# Altium PCB OSI_542.PcbDoc
Units mil, origin at the board's own origin, x right, y up, seen from the top; angles counter-clockwise.
Board outline 11210 x 6010 mil, 2 copper layers (Top Layer, Bottom Layer); 56 components, 0 nets, 309 pads, 89 vias.
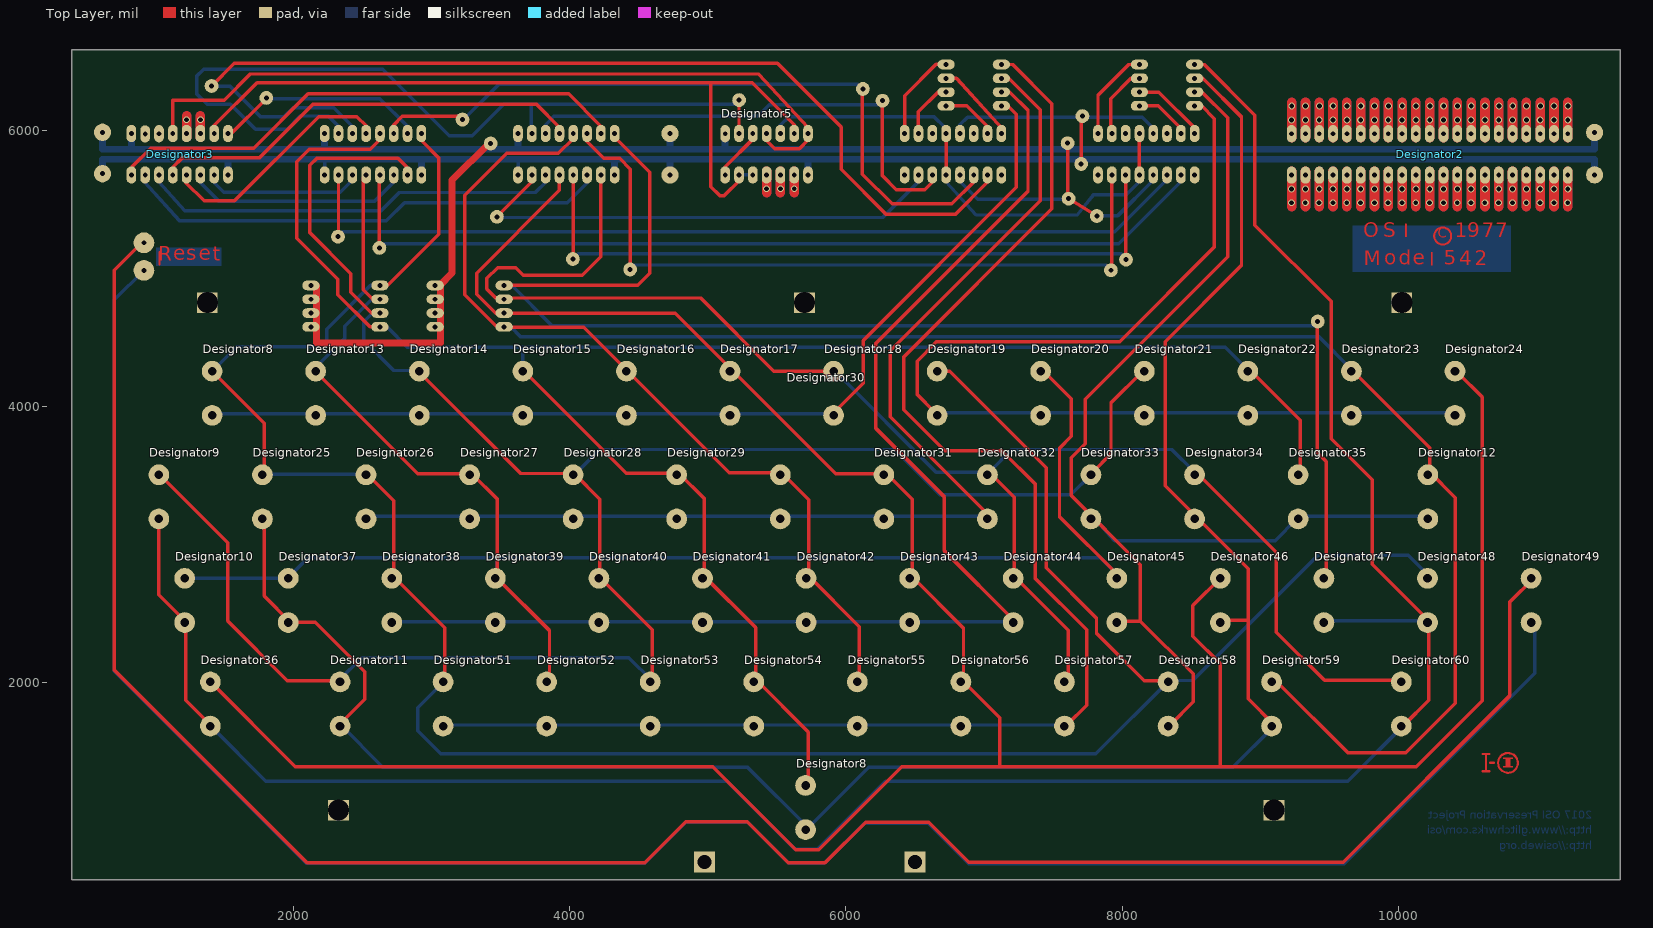
[diagram p0: Top Layer view]
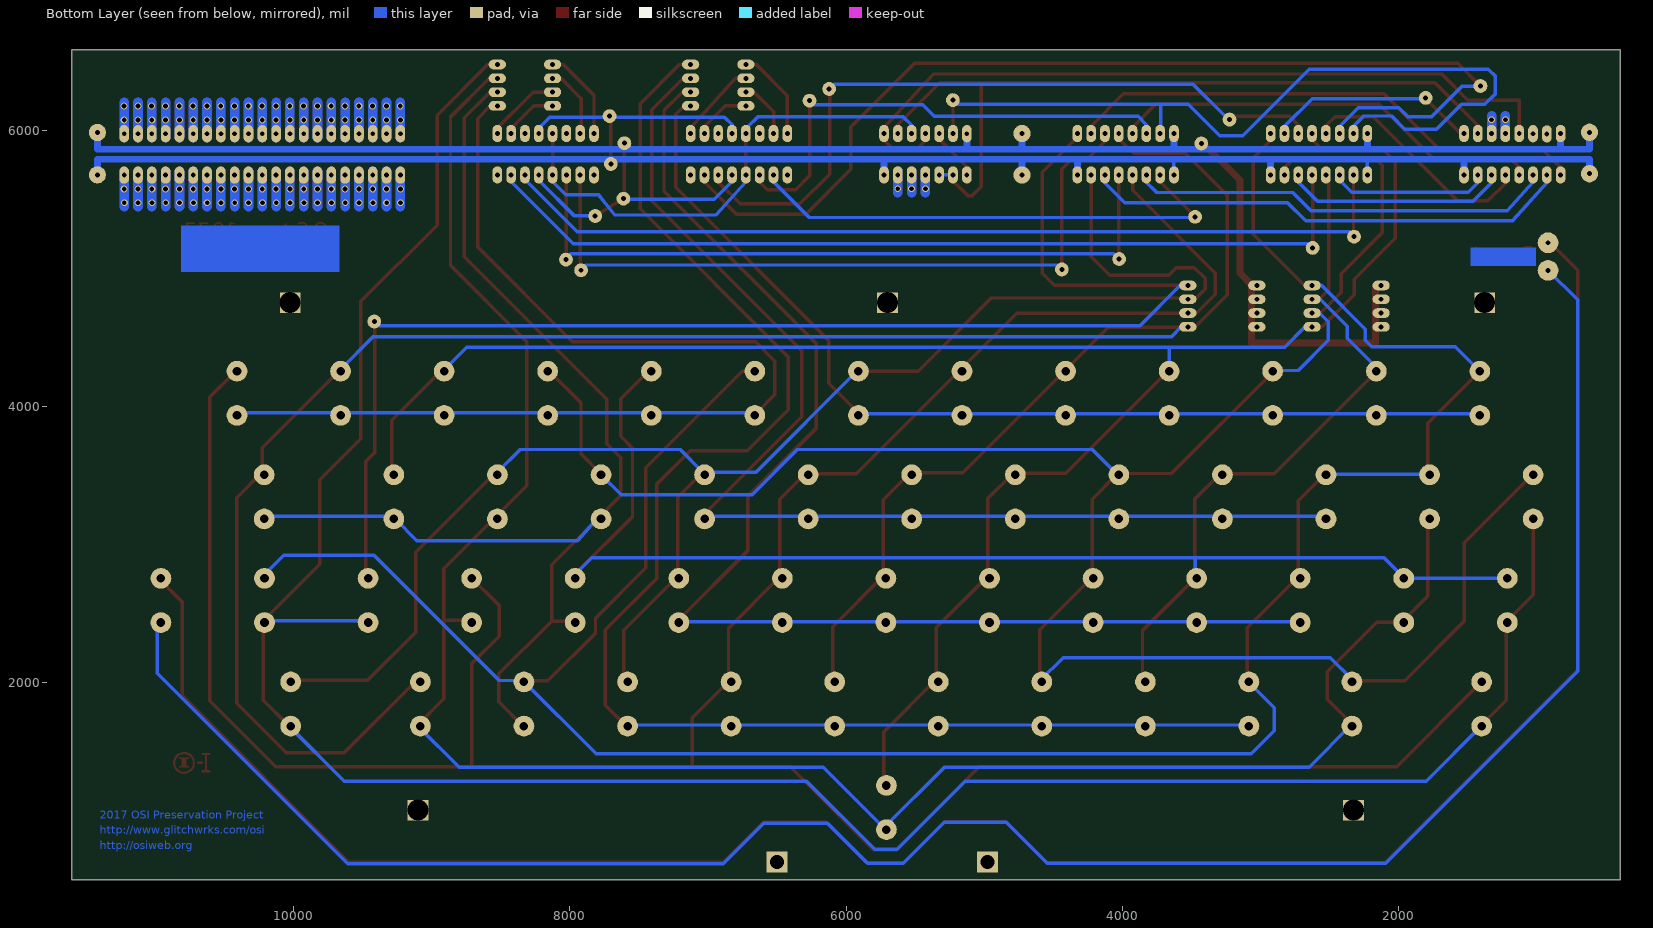
[diagram p1: Bottom Layer view, seen from below]

## Layer stack, top to bottom
Top Solder: solder mask 0.4, Solder Resist, Dk 3.5
Top Layer: signal copper 1.4
Dielectric 1: dielectric 12.6, FR-4, Dk 4.8
Bottom Layer: signal copper 1.4
Bottom Solder: solder mask 0.4, Solder Resist, Dk 3.5

## Board outline
396,571 11606,571 11606,6581 396,6581

## Design rules (kind name [scope] priority, off if disabled: settings)
Clearance [All] p1: gap=10 ignorepadtopadclearanceinfootprint=FALSE except(0: Arc-Hole Track-Hole SMDPad-Hole THPad-Hole Via-Hole Fill-Hole Poly-Hole Region-Hole Text-Hole)
HoleSize [All] p1: absolutevalues=TRUE maxlimit=250 minlimit=8 maxpercent=80.000 minpercent=20.000
MinimumSolderMaskSliver [All] p1: minsoldermaskwidth=0.5
PolygonConnect [All] p1: connectstyle=Relief reliefconductorwidth=10 reliefentries=4 polygonreliefangle="90 Angle" airgapwidth=10
RoutingVias [All] p1: holewidth=28 width=50 viastyle="Through Hole" minholewidth=28 minwidth=50 maxholewidth=28 maxwidth=50
SolderMaskExpansion [All] p1: expansion=4
Width [All] p1: maxlimit=100 minlimit=6 preferedwidth=10 minimp=50.000000 maximp=50.000000 favimp=50.000000
28 further rules are at their usual default settings.

## Components (designator, comment, footprint, x,y, rotation, side; value= is the part's Value field where it differs from the comment)
Designator2 "Comment" PROTO-21 9228,5675 r0 top
Designator3 "Comment" DIP16 826,5676 r0 top
Designator5 "Comment" DIP14 5126,5676 r0 top
Designator8 "Comment" MD4-PCS 5708,1095 r0 top
Designator8 "Comment" MD4-PCS 1411,4095 r0 top
Designator9 "Comment" MD4-PCS 1025,3345 r0 top
Designator10 "Comment" MD4-PCS 1212,2595 r0 top
Designator11 "Comment" MD4-PCS 2337,1845 r0 top
Designator12 "Comment" MD4-PCS 10214,3345 r0 top
Designator13 "Comment" MD4-PCS 2161,4095 r0 top
Designator14 "Comment" MD4-PCS 2911,4095 r0 top
Designator15 "Comment" MD4-PCS 3661,4095 r0 top
Designator16 "Comment" MD4-PCS 4411,4095 r0 top
Designator17 "Comment" MD4-PCS 5161,4095 r0 top
Designator18 "Comment" MD4-PCS 5911,4095 r0 top
Designator19 "Comment" MD4-PCS 6661,4095 r0 top
Designator20 "Comment" MD4-PCS 7411,4095 r0 top
Designator21 "Comment" MD4-PCS 8161,4095 r0 top
Designator22 "Comment" MD4-PCS 8911,4095 r0 top
Designator23 "Comment" MD4-PCS 9661,4095 r0 top
Designator24 "Comment" MD4-PCS 10411,4095 r0 top
Designator25 "Comment" MD4-PCS 1775,3345 r0 top
Designator26 "Comment" MD4-PCS 2525,3345 r0 top
Designator27 "Comment" MD4-PCS 3275,3345 r0 top
Designator28 "Comment" MD4-PCS 4025,3345 r0 top
Designator29 "Comment" MD4-PCS 4775,3345 r0 top
Designator30 "Comment" MD4-PCS 5525,3345 r0 top
Designator31 "Comment" MD4-PCS 6275,3345 r0 top
Designator32 "Comment" MD4-PCS 7025,3345 r0 top
Designator33 "Comment" MD4-PCS 7775,3345 r0 top
Designator34 "Comment" MD4-PCS 8525,3345 r0 top
Designator35 "Comment" MD4-PCS 9275,3345 r0 top
Designator36 "Comment" MD4-PCS 1398,1845 r0 top
Designator37 "Comment" MD4-PCS 1962,2595 r0 top
Designator38 "Comment" MD4-PCS 2712,2595 r0 top
Designator39 "Comment" MD4-PCS 3462,2595 r0 top
Designator40 "Comment" MD4-PCS 4212,2595 r0 top
Designator41 "Comment" MD4-PCS 4962,2595 r0 top
Designator42 "Comment" MD4-PCS 5712,2595 r0 top
Designator43 "Comment" MD4-PCS 6462,2595 r0 top
Designator44 "Comment" MD4-PCS 7212,2595 r0 top
Designator45 "Comment" MD4-PCS 7962,2595 r0 top
Designator46 "Comment" MD4-PCS 8712,2595 r0 top
Designator47 "Comment" MD4-PCS 9462,2595 r0 top
Designator48 "Comment" MD4-PCS 10212,2595 r0 top
Designator49 "Comment" MD4-PCS 10962,2595 r0 top
Designator51 "Comment" MD4-PCS 3083,1845 r0 top
Designator52 "Comment" MD4-PCS 3833,1845 r0 top
Designator53 "Comment" MD4-PCS 4583,1845 r0 top
Designator54 "Comment" MD4-PCS 5333,1845 r0 top
Designator55 "Comment" MD4-PCS 6083,1845 r0 top
Designator56 "Comment" MD4-PCS 6833,1845 r0 top
Designator57 "Comment" MD4-PCS 7583,1845 r0 top
Designator58 "Comment" MD4-PCS 8333,1845 r0 top
Designator59 "Comment" MD4-PCS 9083,1845 r0 top
Designator60 "Comment" MD4-PCS 10022,1845 r0 top

## Footprints (in the part's own frame and the unit in brackets; to place one, negate y for a bottom-side part, rotate by r counter-clockwise, add the part's x,y. Pads: shape width x height; smd on the part's side, far side on the other; paste and mask are expansions set on the pad)
DIP14 [mil] "Standard DIP 16"
  oval 70x125 hole 35: 1(0,0) 2(100,0) 3(200,0) 4(300,0) 5(400,0) 6(500,0) 7(600,0) 8(600,300) 9(500,300) 10(400,300) 11(300,300) 12(200,300) 13(100,300) 14(0,299)
DIP16 [mil] "Standard DIP 16"
  oval 70x125 hole 35: 1(0,0) 2(100,0) 3(200,0) 4(300,0) 5(400,0) 6(500,0) 7(600,0) 8(700,0) 9(700,300) 10(600,300) 11(500,300) 12(400,300) 13(300,300) 14(200,299) 15(100,297) 16(0,300)
MD4-PCS [mil] "Futaba MD4-PCS key"
  round 150 hole 62: 1(0,160) 2(0,-160)
PROTO-21 [mil]
  oval 70x125 hole 35: 1(0,0) 2(100,0) 3(200,0) 4(300,0) 5(400,0) 6(500,0) 7(600,0) 8(700,0) 9(800,0) 10(900,0) 11(1000,0) 12(1100,0) 13(1200,0) 14(1300,0) 15(1400,0) 16(1500,0) 17(1600,0) 18(1700,0) 19(1800,0) 20(1900,0) 21(2000,0) 22(2000,300) 23(1900,300) 24(1800,300) 25(1700,300) 26(1600,300) 27(1500,300) 28(1400,300) 29(1300,300) 30(1200,300) 31(1100,300) 32(1000,300) 33(900,300) 34(800,300) 35(700,300) 36(600,300) 37(500,300) 38(400,300) 39(300,300) 40(200,300) 41(100,300) 42(0,300)

## Free pads (board coordinates)
  round 125 hole 36: 1(617,5685) 1(617,5985) 1(4726,5676) 1(4726,5976) 1(11422,5677) 1(11422,5983)
  round 150 hole 36: 1(917,4985) 1(917,5185)
  rect 150x150 hole 152: 1(1376,4751) 1(2326,1076) 1(5701,4751) 1(9101,1076) 1(10026,4751)
  round 100 hole 36: 1(1407,6320) 1(1803,6234) 1(2322,5229) 1(2622,5148) 1(3224,6077) 1(3428,5904) 1(3473,5373) 1(4023,5067) 1(4438,4992) 1(5227,6218) 1(6123,6299) 1(6265,6214) 1(7606,5906) 1(7613,5504) 1(7704,5756) 1(7713,6102) 1(7817,5379) 1(7919,4986) 1(8029,5063) 1(9417,4615)
  oval 125x70 hole 36: 1(2126,4576) 1(2126,4676) 1(2126,4776) 1(2126,4876) 1(2626,4576) 1(2626,4676) 1(2626,4776) 1(2626,4876) 1(3026,4576) 1(3026,4676) 1(3026,4776) 1(3026,4876) 1(3526,4576) 1(3526,4676) 1(3526,4776) 1(3526,4876) 1(6726,6176) 1(6726,6276) 1(6726,6376) 1(6726,6476) 1(7126,6176) 1(7126,6276) 1(7126,6376) 1(7126,6476) 1(8126,6176) 1(8126,6276) 1(8126,6376) 1(8126,6476) 1(8526,6176) 1(8526,6276) 1(8526,6376) 1(8526,6476)
  oval 70x125 hole 36: 1(2226,5676) 1(2226,5976) 1(2326,5676) 1(2326,5976) 1(2426,5676) 1(2426,5976) 1(2526,5676) 1(2526,5976) 1(2626,5676) 1(2626,5976) 1(2726,5676) 1(2726,5976) 1(2826,5676) 1(2826,5976) 1(2926,5676) 1(2926,5976) 1(3626,5676) 1(3626,5976) 1(3726,5676) 1(3726,5976) 1(3826,5676) 1(3826,5976) 1(3926,5676) 1(3926,5976) 1(4026,5676) 1(4026,5976) 1(4126,5676) 1(4126,5976) 1(4226,5676) 1(4226,5976) 1(4326,5676) 1(4326,5976) 1(6426,5676) 1(6426,5976) 1(6526,5676) 1(6526,5976) 1(6626,5676) 1(6626,5976) 1(6726,5676) 1(6726,5976) 1(6826,5676) 1(6826,5976) 1(6926,5676) 1(6926,5976) 1(7026,5676) 1(7026,5976) 1(7126,5676) 1(7126,5976) 1(7826,5676) 1(7826,5976) 1(7926,5676) 1(7926,5976) 1(8026,5676) 1(8026,5976) 1(8126,5676) 1(8126,5976) 1(8226,5676) 1(8226,5976) 1(8326,5676) 1(8326,5976) 1(8426,5676) 1(8426,5976) 1(8526,5676) 1(8526,5976)
  rect 150x150 hole 102: 1(4976,701) 1(6501,701)

## Via types
v1: diameter 50, hole 35, Top Layer to Bottom Layer, 89 vias

## Nets (pads, with @x,y where several pads share a name; then routed paths per layer and width w, separated by ;. In a path a pad name is that pad's centre, name@x,y a point inside that pad or via, vN(x,y) a via of type N, cw(c..) or ccw(c..) an arc to the next point about the centre after c; other vN are vias at no path point)
pads on no net: Designator2.1 Designator2.2 Designator2.3 Designator2.4 Designator2.5 Designator2.6 Designator2.7 Designator2.8 Designator2.9 Designator2.10 Designator2.11 Designator2.12 Designator2.13 Designator2.14 Designator2.15 Designator2.16 Designator2.17 Designator2.18 Designator2.19 Designator2.20 Designator2.21 Designator2.22 Designator2.23 Designator2.24 Designator2.25 Designator2.26 Designator2.27 Designator2.28 Designator2.29 Designator2.30 Designator2.31 Designator2.32 Designator2.33 Designator2.34 Designator2.35 Designator2.36 Designator2.37 Designator2.38 Designator2.39 Designator2.40 Designator2.41 Designator2.42 Designator3.1 Designator3.2 Designator3.3 Designator3.4 Designator3.5 Designator3.6 Designator3.7 Designator3.8 Designator3.9 Designator3.10 Designator3.11 Designator3.12 Designator3.13 Designator3.14 Designator3.15 Designator3.16 Designator5.1 Designator5.2 Designator5.3 Designator5.4 Designator5.5 Designator5.6 Designator5.7 Designator5.8 Designator5.9 Designator5.10 Designator5.11 Designator5.12 Designator5.13 Designator5.14 Designator8.1 Designator8.2 Designator9.1 Designator9.2 Designator10.1 Designator10.2 Designator11.1 Designator11.2 Designator12.1 Designator12.2 Designator13.1 Designator13.2 Designator14.1 Designator14.2 Designator15.1 Designator15.2 Designator16.1 Designator16.2 Designator17.1 Designator17.2 Designator18.1 Designator18.2 Designator19.1 Designator19.2 Designator20.1 Designator20.2 Designator21.1 Designator21.2 Designator22.1 Designator22.2 Designator23.1 Designator23.2 Designator24.1 Designator24.2 Designator25.1 Designator25.2 Designator26.1 Designator26.2 Designator27.1 Designator27.2 Designator28.1 Designator28.2 Designator29.1 Designator29.2 Designator30.1 Designator30.2 Designator31.1 Designator31.2 Designator32.1 Designator32.2 Designator33.1 Designator33.2 Designator34.1 Designator34.2 Designator35.1 Designator35.2 Designator36.1 Designator36.2 Designator37.1 Designator37.2 Designator38.1 Designator38.2 Designator39.1 Designator39.2 Designator40.1 Designator40.2 Designator41.1 Designator41.2 Designator42.1 Designator42.2 Designator43.1 Designator43.2 Designator44.1 Designator44.2 Designator45.1 Designator45.2 Designator46.1 Designator46.2 Designator47.1 Designator47.2 Designator48.1 Designator48.2 Designator49.1 Designator49.2 Designator51.1 Designator51.2 Designator52.1 Designator52.2 Designator53.1 Designator53.2 Designator54.1 Designator54.2 Designator55.1 Designator55.2 Designator56.1 Designator56.2 Designator57.1 Designator57.2 Designator58.1 Designator58.2 Designator59.1 Designator59.2 Designator60.1 Designator60.2
copper on no net: | length 382556.6
  Top Layer w10: 10794.5,1491.9 10780.3,1490.6 10766.7,1486.4 10754.2,1479.7 10743.2,1470.7 10734.2,1459.7 10727.5,1447.2 10723.3,1433.6 10722,1419.5 10723.3,1405.3 10727.5,1391.7 10734.2,1379.2 10743.2,1368.2 10754.2,1359.2 10766.7,1352.5 10780.3,1348.3 10794.5,1347 10808.6,1348.3 10822.2,1352.5 10834.7,1359.2 10845.7,1368.2 10854.7,1379.2 10861.4,1391.7 10865.6,1405.3 10867,1419.5 10865.6,1433.6 10861.4,1447.2 10854.7,1459.7 10845.7,1470.7 10834.7,1479.7 10822.2,1486.4 10808.6,1490.6 10794.5,1492 ; 10762,1389.5 10830.5,1389.5 10762,1389.5 ; 10762,1450.5 10830.5,1450.5 10762,1450.5 ; 10781,1391.5 10781,1449.5 10809,1449.5 10809,1391.5 10781,1391.5 ; 10786,1396.5 10786,1444.5 10804,1444.5 10804,1396.5 10786,1396.5 ; 10792.6,1403.1 10792.6,1437.8 10797.3,1437.8 10797.3,1403.1 10792.6,1403.1
  Top Layer w15: 1029.9,5027.5 1029.9,5117.5 ; 10634.9,1358 10659,1358 10611,1358 10634.9,1358 ; 10634.9,1358 10634.9,1483 ; 10634.9,1483 10611,1483 10659,1483 10634.9,1483 ; 10383.61,5234 ccw(c10322,5234) 10383.61,5234 ; 10664.5,1419.5 10695,1419.5 10664.5,1419.5 ; 10866.2,1418 ccw(c10795,1418) 10866.2,1418
  Top Layer w25: 834,5687 834,5738 966,5870 1712,5870 2105,6263 3992,6263 4226,6029 4226,5976 ; 917,5185 887,5172 701,4986 701,2091 2098,694 4543,694 4841,992 5287,992 5583,696 5849,696 6143,990 6599,990 6890,699 9602,699 10806,1903 10806,2581 10989,2764 ; 1025,3204 1025,2635 1219,2441 ; 1032,3505 1523,3014 1523,2446 1955,2014 2328,2014 ; 1126,5676 1126,5732 1193,5799 1752,5799 2141,6188 3760,6188 3926,6022 3926,5976 ; 1126,5976 1125,5994 1125,6218 1499,6218 1688,6407 5369,6407 5725,6021 ; 1220,2440 1219,2441 ; 1226,5676 1221,5666 1221,5621 1353,5489 1573,5489 2182,6098 2459,6098 2526,6031 2526,5976 ; 1392,2012 2012,1392 5037,1392 5638,791 5805,791 6405,1391 7113,1391 ; 1394,1698 1219,1873 1219,2441 ; 1407,6320 1572,6485 5505,6485 5967,6023 5967,5716 6290,5393 6796,5393 7025,5622 7025,5682 7026,5676 ; 1411,4255 1787,3879 1787,3517 ; 1426,5976 1426,6035 1736,6345 5023,6345 ; 1526,5976 1550,5976 1796,6222 1803,6234 ; 1787,3204 1787,2627 1976,2438 ; 1972,2437 1976,2438 ; 2159,4255 2901,3513 3292,3513 ; 2322,5229 2326,5247 2326,5676 ; 2327,2014 2337,2012 ; 2338,1697 2350,1713 2517,1880 2517,2079 2158,2438 1976,2438 ; 2526,5676 2505,5655 2505,4845 2570,4780 2646,4780 2626,4776 ; 2537,3508 2526,3516 2725,3317 2725,2766 ; 2622,5148 2622,5665 2626,5676 ; 2626,4576 2631,4577 2554,4577 2321,4810 2321,4920 2023,5218 2023,5772 2113,5862 2557,5862 2626,5931 2626,5976 ; 2626,4676 2568,4676 2416,4828 2416,4961 2118,5259 2118,5745 2170,5797 2757,5797 2824,5730 2824,5693 2826,5676 ; 2626,4876 2624,4877 2684,4877 3053,5246 3053,5799 2926,5926 2926,5976 ; 2726,5976 2726,6038 2789,6101 3200,6101 3224,6077 ; 2728,2754 2725,2766 ; 2904,4255 3645,3514 4015,3514 4037,3507 4041,3507 4219,3329 4219,2762 ; 3095,2012 3095,2396 2725,2766 ; 3287,3514 3292,3513 ; 3471,2754 3474,2757 ; 3473,5373 3726,5626 3726,5676 ; 3526,4576 3477,4573 ; 3526,4676 3464,4675 ; 3526,4776 3465,4785 ; 3526,4876 4493,4876 4580,4963 4580,5697 4327,5950 4327,5977 4326,5976 ; 3660,4255 3663,4263 4409,3517 4791,3517 ; 3846,2012 3854,2022 3854,2377 3474,2757 ; 3926,5676 3926,5565 3326,4965 3326,4813 3464,4675 ; 4023,5067 4026,5076 4026,5676 ; 4026,5976 4029,5970 4029,5943 3918,5832 3543,5832 3240,5529 3240,4810 3477,4573 ; 4126,5976 4126,5916 4246,5796 4362,5796 4440,5718 4440,5006 4438,4992 ; 4218,2754 4219,2762 ; 4226,5676 4225,5674 4225,5083 4091,4949 3665,4949 3609,5005 3478,5005 3400,4927 3400,4850 3465,4785 ; 4597,2012 4597,2384 4219,2762 ; 4787,3524 4791,3517 ; 4972,2764 4973,2772 ; 5126,5676 5126,5735 5331,5940 5326,5976 ; 5226,5676 5227,5683 5227,5635 5119,5527 5086,5527 5023,5590 5023,6345 ; 5226,5976 5226,6213 5227,6218 ; 5345,2012 5346,2023 ; 5426,5976 5426,5925 5484,5867 5664,5867 5725,5928 5725,6021 ; 5537,3524 5535,3519 ; 5626,5976 5625,5985 5625,6041 5321,6345 5023,6345 ; 5726,5976 5725,6021 ; 5727,1257 5727,1642 5346,2023 ; 5729,2761 5730,2772 ; 5922,3948 5930,3972 6125,4167 6125,4477 7234,5586 7234,6115 7173,6176 7126,6176 ; 5922,4255 5478,4255 4948,4785 3465,4785 ; 6098,2012 6098,2404 5730,2772 ; 6123,6299 6120,6287 6120,5682 6335,5467 6768,5467 6926,5625 6926,5676 ; 6265,6214 6265,5670 6366,5569 6571,5569 6629,5627 6629,5666 6626,5676 ; 6287,3524 6297,3513 ; 6426,5976 6426,6250 6653,6477 6715,6477 6726,6476 ; 6480,2767 6482,2765 ; 6526,5976 6525,5983 6525,6134 6667,6276 6726,6276 ; 6665,4255 6668,4255 6752,4255 7450,3557 7450,2832 7815,2467 7815,2357 8160,2012 8348,2012 ; 6668,3948 6640,3962 6516,4086 6516,4327 6656,4467 7982,4467 8669,5154 8669,6084 8577,6176 8526,6176 ; 6726,5676 6726,5976 6726,5980 ; 6726,6176 6876,6176 7027,6025 7027,5985 7026,5976 ; 6726,6376 6801,6376 7099,6048 7125,6022 7125,5972 7126,5976 ; 7037,3204 7034,3212 6322,3924 6322,4402 7409,5489 7409,6148 7181,6376 7126,6376 ; 7037,3524 7218,3343 7218,2769 ; 7122,6276 7126,6276 7188,6276 7319,6145 7319,5557 6218,4456 6218,3840 6714,3344 6714,2953 7220,2447 ; 7126,6476 7208,6476 7492,6192 7492,5431 6419,4358 6419,3977 6716,3680 7129,3680 7373,3436 7373,2753 7743,2383 7743,1835 7601,1693 ; 7220,2764 7218,2769 ; 7421,4265 7632,4054 7632,3783 7547,3698 7547,3202 7972,2777 7977,2769 ; 7601,2012 7609,2028 7609,2378 7218,2769 ; 7606,5906 7606,5522 7613,5504 7817,5379 ; 7704,5756 7704,6086 7713,6102 ; 7787,3524 7920,3657 7920,4026 8153,4259 8164,4267 ; 7826,5976 7826,6254 8048,6476 8126,6476 ; 7919,4986 7926,5003 7926,5676 ; 7926,5976 7918,5991 7918,6229 8065,6376 8126,6376 ; 7970,2446 7982,2445 8133,2445 ; 8026,5676 8026,5067 8029,5063 ; 8126,5676 8126,5976 ; 8126,6176 8263,6176 8426,6013 8426,5976 ; 8126,6276 8267,6276 8532,6011 8526,5976 ; 8347,1692 8348,1693 8515,1860 8515,2063 8133,2445 ; 8526,6276 8579,6276 8765,6090 8765,5084 7733,4052 7733,3729 7631,3627 7631,3355 8133,2853 8133,2445 ; 8526,6376 8585,6376 8865,6096 8865,5021 8312,4468 8312,3426 8914,2824 8914,2451 ; 8526,6476 8594,6476 8961,6109 8961,5313 9514,4760 9514,3766 9812,3468 9812,2857 10221,2448 ; 8537,3524 9116,2945 9116,2366 9466,2016 10020,2016 10043,2012 ; 8730,2451 8914,2451 ; 8732,2773 8726,2771 8513,2558 8513,2336 8711,2138 8711,1391 ; 8917,4273 9291,3899 9291,3541 9287,3524 ; 9103,1693 8914,1882 8914,2451 ; 9103,2012 9120,2007 9636,1491 10055,1491 10413,1849 10413,3339 10227,3525 ; 9417,4615 9415,4603 9415,3666 9480,3601 9480,2767 ; 9668,4261 10227,3702 10227,3525 ; 10042,1693 10221,1872 10221,2448 ; 10225,3524 10227,3525 ; 10228,2447 10221,2448 ; 10415,4260 10436,4240 10608,4068 10608,1869 10130,1391 8711,1391 ; 3292,3513 3474,3331 3474,2757 ; 3464,4675 4766,4675 5928,3513 6297,3513 ; 3477,4573 4103,4573 5157,3519 5535,3519 ; 4791,3517 4973,3335 4973,2772 ; 4973,2772 5346,2399 5346,2023 ; 5535,3519 5730,3324 5730,2772 ; 6297,3513 6482,3328 6482,2765 ; 6482,2765 6852,2395 6852,2018 6854,2012 6846,2013 7113,1746 7113,1391 ; 7113,1391 8711,1391
  Top Layer w50: 2126,4876 2166,4876 2166,4458 3064,4458 3064,4881 ; 3026,4876 3064,4881 ; 3428,5904 3415,5905 3149,5639 3149,4966 3064,4881
  Top Layer w70: 1226,5948 1226,6103 ; 1326,5948 1326,6103 ; 5426,5549 5426,5704 ; 5526,5549 5526,5704 ; 5626,5549 5626,5704 ; 9228,5448 9228,5703 ; 9228,5947 9228,6202 ; 9328,5448 9328,5703 ; 9328,5947 9328,6202 ; 9428,5448 9428,5703 ; 9428,5947 9428,6202 ; 9528,5448 9528,5703 ; 9528,5947 9528,6202 ; 9628,5448 9628,5703 ; 9628,5947 9628,6202 ; 9728,5448 9728,5703 ; 9728,5947 9728,6202 ; 9828,5448 9828,5703 ; 9828,5947 9828,6202 ; 9928,5448 9928,5703 ; 9928,5947 9928,6202 ; 10028,5448 10028,5703 ; 10028,5947 10028,6202 ; 10128,5448 10128,5703 ; 10128,5947 10128,6202 ; 10228,5448 10228,5703 ; 10228,5947 10228,6202 ; 10328,5448 10328,5703 ; 10328,5947 10328,6202 ; 10428,5448 10428,5703 ; 10428,5947 10428,6202 ; 10528,5448 10528,5703 ; 10528,5947 10528,6202 ; 10628,5448 10628,5703 ; 10628,5947 10628,6202 ; 10728,5448 10728,5703 ; 10728,5947 10728,6202 ; 10828,5448 10828,5703 ; 10828,5947 10828,6202 ; 10928,5448 10928,5703 ; 10928,5947 10928,6202 ; 11028,5448 11028,5703 ; 11028,5947 11028,6202 ; 11128,5448 11128,5703 ; 11128,5947 11128,6202 ; 11228,5448 11228,5703 ; 11228,5947 11228,6202
  Bottom Layer w25: 917,4985 918,4987 702,4771 702,2082 2092,692 4545,692 4841,988 5289,988 5585,692 5845,692 6135,982 6598,982 6891,689 9610,689 10989,2068 10989,2448 ; 926,5676 924,5663 924,5623 1174,5344 2672,5344 2804,5476 3982,5476 4126,5620 4126,5676 ; 1026,5676 1026,5625 1212,5416 2634,5416 2767,5549 3751,5549 3829,5627 3829,5671 3826,5676 ; 1212,2755 1962,2755 ; 1326,5676 1322,5673 1322,5625 1463,5484 2585,5484 2726,5625 2726,5676 ; 1394,1698 1403,1683 1800,1286 5136,1286 5630,792 5793,792 6287,1286 9635,1286 10042,1693 ; 1407,6320 1538,6320 1759,6099 1932,6099 1997,6164 2291,6164 2425,6030 2425,5983 2426,5976 ; 1411,3948 5922,3948 ; 1411,4255 1588,4432 2194,4432 2240,4478 2240,4559 2558,4877 2618,4877 2626,4876 ; 1426,5676 1426,5620 1494,5552 2339,5552 2426,5639 2426,5676 ; 1787,3517 1815,3508 2537,3508 ; 1803,6234 1824,6228 2625,6228 2826,6027 2826,5976 ; 1962,2754 1969,2768 2105,2904 3471,2904 ; 2159,4255 2190,4313 2372,4495 2372,4580 2568,4776 2626,4776 ; 2226,5676 2226,5790 ; 2322,5229 2357,5264 7948,5264 8325,5641 8326,5676 ; 2326,5976 2326,6029 2252,6103 2050,6103 1954,6007 1725,6007 1544,6188 1375,6188 1298,6265 1298,6391 1349,6442 2646,6442 3129,5959 3295,5959 3524,6188 3723,6188 ; 2328,2015 2494,2181 4428,2181 4597,2012 ; 2337,2012 2367,2054 ; 2338,1697 2647,1388 5288,1388 5728,948 ; 2537,3204 7037,3204 ; 2622,5148 2612,5148 2643,5179 7977,5179 8426,5628 8426,5676 ; 2626,4576 2677,4576 2824,4429 3660,4429 ; 2626,4676 2570,4676 2508,4614 2508,4478 2726,4260 2905,4260 2904,4255 ; 2727,2442 4222,2442 6480,2442 7214,2442 7220,2447 ; 3093,1694 3112,1693 3847,1693 5351,1693 6854,1693 7601,1693 ; 3095,2012 2901,1818 2901,1650 3066,1485 7811,1485 8341,2015 ; 3224,6077 3245,6091 3488,6334 6088,6334 6123,6299 ; 3471,2749 3471,2904 ; 3473,5373 3481,5368 6268,5368 6526,5626 6526,5676 ; 3526,4576 3532,4577 3572,4577 3643,4506 9423,4506 9668,4261 ; 3526,4876 3581,4876 3872,4585 9398,4585 9410,4597 9417,4615 ; 3626,5670 3626,5676 3626,5790 ; 3660,4255 3660,4429 ; 3726,5976 3723,5984 3723,6188 ; 3826,5976 3826,6041 3886,6101 5361,6101 5445,6185 6256,6185 6265,6214 ; 4023,5067 4061,5105 7995,5105 8020,5080 8029,5063 ; 4037,3507 4218,3688 6353,3688 6680,3361 7630,3361 7775,3506 7787,3524 ; 4438,4992 4454,5024 7881,5024 7919,4986 ; 5226,5676 5326,5676 ; 5227,6218 5215,6188 3723,6188 ; 5526,5976 5526,6036 5589,6099 6637,6099 6716,6020 6726,5976 ; 5727,945 5728,948 ; 5922,4255 6653,3524 7037,3524 7201,3688 8361,3688 8520,3529 8537,3524 ; 6668,3948 6684,3953 10415,3953 ; 6726,5676 6727,5670 6727,5625 6943,5386 7675,5386 7793,5533 8031,5533 8126,5628 8126,5676 ; 6826,5676 6826,5629 6954,5501 7602,5501 7613,5504 ; 6826,5976 6826,6040 6881,6095 8146,6095 8223,6018 8223,5985 8226,5976 ; 7787,3204 7946,3028 9109,3028 9266,3185 9287,3204 10225,3204 ; 7817,5379 7967,5379 8226,5638 8226,5676 ; 7977,2769 7842,2904 3471,2904 ; 8348,2012 8341,2015 ; 8917,4273 8885,4292 8748,4429 3660,4429 ; 9103,1693 9098,1682 8802,1386 6166,1386 5728,948 ; 9480,2452 9483,2447 10228,2447 ; 10228,2770 10202,2791 10072,2921 9419,2921 8513,2015 8341,2015
  Bottom Layer w50: 617,5685 617,5790 1526,5790 ; 617,5985 617,5862 826,5862 ; 826,5976 826,5862 ; 1526,5676 1526,5790 ; 2226,5976 2226,5862 ; 2926,5676 2926,5790 ; 3626,5976 3626,5862 ; 4326,5676 4326,5790 ; 4726,5676 4726,5790 ; 4726,5976 4726,5862 ; 5126,5976 5126,5975 5126,5862 ; 5726,5676 5726,5790 ; 11422,5677 11422,5790 5726,5790 ; 11422,5983 11422,5862 5126,5862 ; 826,5862 2226,5862 ; 1526,5790 2226,5790 2926,5790 ; 2226,5862 3626,5862 ; 2926,5790 3626,5790 4326,5790 ; 3626,5862 4726,5862 ; 4326,5790 4726,5790 ; 4726,5790 5726,5790 ; 4726,5862 5126,5862
  Bottom Layer w70: 1226,5948 1226,6103 ; 1326,5948 1326,6103 ; 5426,5549 5426,5704 ; 5526,5549 5526,5704 ; 5626,5549 5626,5704 ; 9228,5448 9228,5703 ; 9228,5947 9228,6202 ; 9328,5448 9328,5703 ; 9328,5947 9328,6202 ; 9428,5448 9428,5703 ; 9428,5947 9428,6202 ; 9528,5448 9528,5703 ; 9528,5947 9528,6202 ; 9628,5448 9628,5703 ; 9628,5947 9628,6202 ; 9728,5448 9728,5703 ; 9728,5947 9728,6202 ; 9828,5448 9828,5703 ; 9828,5947 9828,6202 ; 9928,5448 9928,5703 ; 9928,5947 9928,6202 ; 10028,5448 10028,5703 ; 10028,5947 10028,6202 ; 10128,5448 10128,5703 ; 10128,5947 10128,6202 ; 10228,5448 10228,5703 ; 10228,5947 10228,6202 ; 10328,5448 10328,5703 ; 10328,5947 10328,6202 ; 10428,5448 10428,5703 ; 10428,5947 10428,6202 ; 10528,5448 10528,5703 ; 10528,5947 10528,6202 ; 10628,5448 10628,5703 ; 10628,5947 10628,6202 ; 10728,5448 10728,5703 ; 10728,5947 10728,6202 ; 10828,5448 10828,5703 ; 10828,5947 10828,6202 ; 10928,5448 10928,5703 ; 10928,5947 10928,6202 ; 11028,5448 11028,5703 ; 11028,5947 11028,6202 ; 11128,5448 11128,5703 ; 11128,5947 11128,6202 ; 11228,5448 11228,5703 ; 11228,5947 11228,6202
  other v1: 9227,5475 9327,5475 9427,5475 9527,5475 9627,5475 9727,5475 9827,5475 9927,5475 10027,5475 10127,5475 10227,5475 10327,5475 10427,5475 10527,5475 10627,5475 10727,5475 10827,5475 10927,5475 11027,5475 11127,5475 11227,5475 9228,5575 9328,5575 9428,5575 9528,5575 9628,5575 9728,5575 9828,5575 9928,5575 10028,5575 10128,5575 10228,5575 10328,5575 10428,5575 10528,5575 10628,5575 10728,5575 10828,5575 10928,5575 11028,5575 11128,5575 11228,5575 5426,5576 5526,5576 5626,5576 9228,6075 9328,6075 9428,6075 9528,6075 9628,6075 9728,6075 9828,6075 9928,6075 10028,6075 10128,6075 10228,6075 10328,6075 10428,6075 10528,6075 10628,6075 10728,6075 10828,6075 10928,6075 11028,6075 11128,6075 11228,6075 1226,6076 1326,6076 9229,6175 9329,6175 9429,6175 9529,6175 9629,6175 9729,6175 9829,6175 9929,6175 10029,6175 10129,6175 10229,6175 10329,6175 10429,6175 10529,6175 10629,6175 10729,6175 10829,6175 10929,6175 11029,6175 11129,6175 11229,6175

## Other copper
Top Layer:
  region: 10815,4975
  text "C" at 10285,5195 h120
  text "I" at 10038,5192 h180
  text "O" at 9745,5190 h180
  text "S" at 9893,5190 h180
  text "7" at 10604.33,5189.32 h180
  text "7" at 10701,5189.32 h180
  text "1" at 10411,5187.41 h180
  text "9" at 10499,5187.41 h180
  text "e" at 1129,5021.83 h180
  text "s" at 1225,5021.83 h180
  text "e" at 1313,5021.83 h180
  text "t" at 1414,5021.08 h180
  text "R" at 1021,5020 h180
  text "o" at 9899,4988.33 h180
  text "d" at 10005,4988.33 h180
  text "e" at 10106.5,4988.33 h180
  text "5" at 10330,4988.42 h180
  text "M" at 9751,4986.5 h180
  text "l" at 10225,4986.5 h180
  text "4" at 10442,4986.5 h180
  text "2" at 10553,4986.5 h180
Bottom Layer:
  rectangle: 1005,5015 1480,5150
  rectangle: 9670,4975 10815,5310
  text "2017 OSI Preservation Project" at 11403.61,992.5 h100
  text "http://www.glitchwrks.com/osi" at 11403.54,882.25 h100
  text "http://osiweb.org" at 11403.54,772 h100

## Silkscreen, mask and mechanical layers (free items; w line width, h text height)
Top Solder:
  lines w78: 1226,5947 1226,6104 ; 1326,5947 1326,6104 ; 5426,5548 5426,5705 ; 5526,5548 5526,5705 ; 5626,5548 5626,5705 ; 9228,5447 9228,5704 ; 9228,5946 9228,6203 ; 9328,5447 9328,5704 ; 9328,5946 9328,6203 ; 9428,5447 9428,5704 ; 9428,5946 9428,6203 ; 9528,5447 9528,5704 ; 9528,5946 9528,6203 ; 9628,5447 9628,5704 ; 9628,5946 9628,6203 ; 9728,5447 9728,5704 ; 9728,5946 9728,6203 ; 9828,5447 9828,5704 ; 9828,5946 9828,6203 ; 9928,5447 9928,5704 ; 9928,5946 9928,6203 ; 10028,5447 10028,5704 ; 10028,5946 10028,6203 ; 10128,5447 10128,5704 ; 10128,5946 10128,6203 ; 10228,5447 10228,5704 ; 10228,5946 10228,6203 ; 10328,5447 10328,5704 ; 10328,5946 10328,6203 ; 10428,5447 10428,5704 ; 10428,5946 10428,6203 ; 10528,5447 10528,5704 ; 10528,5946 10528,6203 ; 10628,5447 10628,5704 ; 10628,5946 10628,6203 ; 10728,5447 10728,5704 ; 10728,5946 10728,6203 ; 10828,5447 10828,5704 ; 10828,5946 10828,6203 ; 10928,5447 10928,5704 ; 10928,5946 10928,6203 ; 11028,5447 11028,5704 ; 11028,5946 11028,6203 ; 11128,5447 11128,5704 ; 11128,5946 11128,6203 ; 11228,5447 11228,5704 ; 11228,5946 11228,6203
Bottom Solder:
  lines w78: 1226,5947 1226,6104 ; 1326,5947 1326,6104 ; 5426,5548 5426,5705 ; 5526,5548 5526,5705 ; 5626,5548 5626,5705 ; 9228,5447 9228,5704 ; 9228,5946 9228,6203 ; 9328,5447 9328,5704 ; 9328,5946 9328,6203 ; 9428,5447 9428,5704 ; 9428,5946 9428,6203 ; 9528,5447 9528,5704 ; 9528,5946 9528,6203 ; 9628,5447 9628,5704 ; 9628,5946 9628,6203 ; 9728,5447 9728,5704 ; 9728,5946 9728,6203 ; 9828,5447 9828,5704 ; 9828,5946 9828,6203 ; 9928,5447 9928,5704 ; 9928,5946 9928,6203 ; 10028,5447 10028,5704 ; 10028,5946 10028,6203 ; 10128,5447 10128,5704 ; 10128,5946 10128,6203 ; 10228,5447 10228,5704 ; 10228,5946 10228,6203 ; 10328,5447 10328,5704 ; 10328,5946 10328,6203 ; 10428,5447 10428,5704 ; 10428,5946 10428,6203 ; 10528,5447 10528,5704 ; 10528,5946 10528,6203 ; 10628,5447 10628,5704 ; 10628,5946 10628,6203 ; 10728,5447 10728,5704 ; 10728,5946 10728,6203 ; 10828,5447 10828,5704 ; 10828,5946 10828,6203 ; 10928,5447 10928,5704 ; 10928,5946 10928,6203 ; 11028,5447 11028,5704 ; 11028,5946 11028,6203 ; 11128,5447 11128,5704 ; 11128,5946 11128,6203 ; 11228,5447 11228,5704 ; 11228,5946 11228,6203
Mechanical 1:
  the board outline again, w10
Drill Drawing:
  circle w10: c491.62,7861.83 r33.33
  lines w10: 458.29,7228.5 491.62,7245.17 524.96,7228.5 508.29,7261.83 524.96,7295.17 491.62,7278.5 458.29,7295.17 474.96,7261.83 458.29,7228.5 ; 458.29,7378.5 524.96,7378.5 524.96,7445.17 458.29,7445.17 458.29,7378.5 ; 458.29,7545.17 474.96,7545.17 491.62,7528.5 508.29,7545.17 524.96,7545.17 508.29,7561.83 524.96,7578.5 508.29,7578.5 491.62,7595.17 474.96,7578.5 458.29,7578.5 474.96,7561.83 458.29,7545.17 ; 458.29,7745.17 524.96,7745.17 491.62,7678.5 458.29,7745.17
  lines w15: 398.5,7183.5 10979.57,7183.5 ; 398.5,7933.5 10979.57,7933.5 ; 949.38,7033.5 949.38,8083.5 ; 1549.22,7033.5 1549.22,8083.5 ; 2688.88,7033.5 2688.88,8083.5 ; 3194.76,7033.5 3194.76,8083.5 ; 3928.56,7033.5 3928.56,8083.5 ; 5428.11,7033.5 5428.11,8083.5 ; 6017.96,7033.5 6017.96,8083.5 ; 6763.76,7033.5 6763.76,8083.5 ; 7413.59,7033.5 7413.59,8083.5 ; 8267.35,7033.5 8267.35,8083.5 ; 9600.96,7033.5 9600.96,8083.5 ; 398.5,7033.5 10979.57,7033.5 10979.57,8083.5 398.5,8083.5 398.5,7033.5
  text "Symbol" at 488.5,7978.5 h72
  text "Count" at 994.38,7978.5 h72
  text "Hole Size" at 1594.22,7978.5 h72
  text "Plated" at 2733.88,7978.5 h72
  text "Hole Type" at 3239.76,7978.5 h72
  text "Drill Layer Pair" at 3973.56,7978.5 h72
  text "Via/Pad" at 5473.11,7978.5 h72
  text "Pad Shape" at 6062.96,7978.5 h72
  text "Template" at 6808.76,7978.5 h72
  text "Description" at 7458.59,7978.5 h72
  text "Hole Tolerance (+)" at 8312.35,7978.5 h72
  text "Hole Tolerance (-)" at 9645.96,7978.5 h72
  text "2" at 994.38,7828.5 h60
  text "102.00mil (2.591mm)" at 1594.22,7828.5 h60
  text "PTH" at 2733.88,7828.5 h60
  text "Round" at 3239.76,7828.5 h60
  text "Top Layer - Bottom Layer" at 3973.56,7828.5 h60
  text "Pad" at 5473.11,7828.5 h60
  text "Rectangle" at 6062.96,7828.5 h60
  text "s381h259" at 6808.76,7828.5 h60
  text "5" at 994.38,7678.5 h60
  text "152.00mil (3.861mm)" at 1594.22,7678.5 h60
  text "PTH" at 2733.88,7678.5 h60
  text "Round" at 3239.76,7678.5 h60
  text "Top Layer - Bottom Layer" at 3973.56,7678.5 h60
  text "Pad" at 5473.11,7678.5 h60
  text "Rectangle" at 6062.96,7678.5 h60
  text "s381h386" at 6808.76,7678.5 h60
  text "106" at 994.38,7528.5 h60
  text "62.00mil (1.575mm)" at 1594.22,7528.5 h60
  text "PTH" at 2733.88,7528.5 h60
  text "Round" at 3239.76,7528.5 h60
  text "Top Layer - Bottom Layer" at 3973.56,7528.5 h60
  text "Pad" at 5473.11,7528.5 h60
  text "Rounded" at 6062.96,7528.5 h60
  text "c381h157" at 6808.76,7528.5 h60
  text "124" at 994.38,7378.5 h60
  text "36.00mil (0.914mm)" at 1594.22,7378.5 h60
  text "PTH" at 2733.88,7378.5 h60
  text "Round" at 3239.76,7378.5 h60
  text "Top Layer - Bottom Layer" at 3973.56,7378.5 h60
  text "Pad" at 5473.11,7378.5 h60
  text "Rounded" at 6062.96,7378.5 h60
  text "(Mixed)" at 6808.76,7378.5 h60
  text "161" at 994.38,7228.5 h60
  text "35.00mil (0.889mm)" at 1594.22,7228.5 h60
  text "PTH" at 2733.88,7228.5 h60
  text "Round" at 3239.76,7228.5 h60
  text "Top Layer - Bottom Layer" at 3973.56,7228.5 h60
  text "(Mixed)" at 5473.11,7228.5 h60
  text "Rounded" at 6062.96,7228.5 h60
  text "(Mixed)" at 6808.76,7228.5 h60
  text "398 Total" at 994.38,7078.5 h60